# Altium PCB MACH LOC NUOC KAROFI V3 271015.PcbDoc (part 1 of 2)
Units mil, origin at the board's own origin, x right, y up, seen from the top; angles counter-clockwise.
Board outline 2986 x 2286 mil, 2 copper layers (Top Layer, Bottom Layer); 83 components, 86 nets, 303 pads, 107 vias.
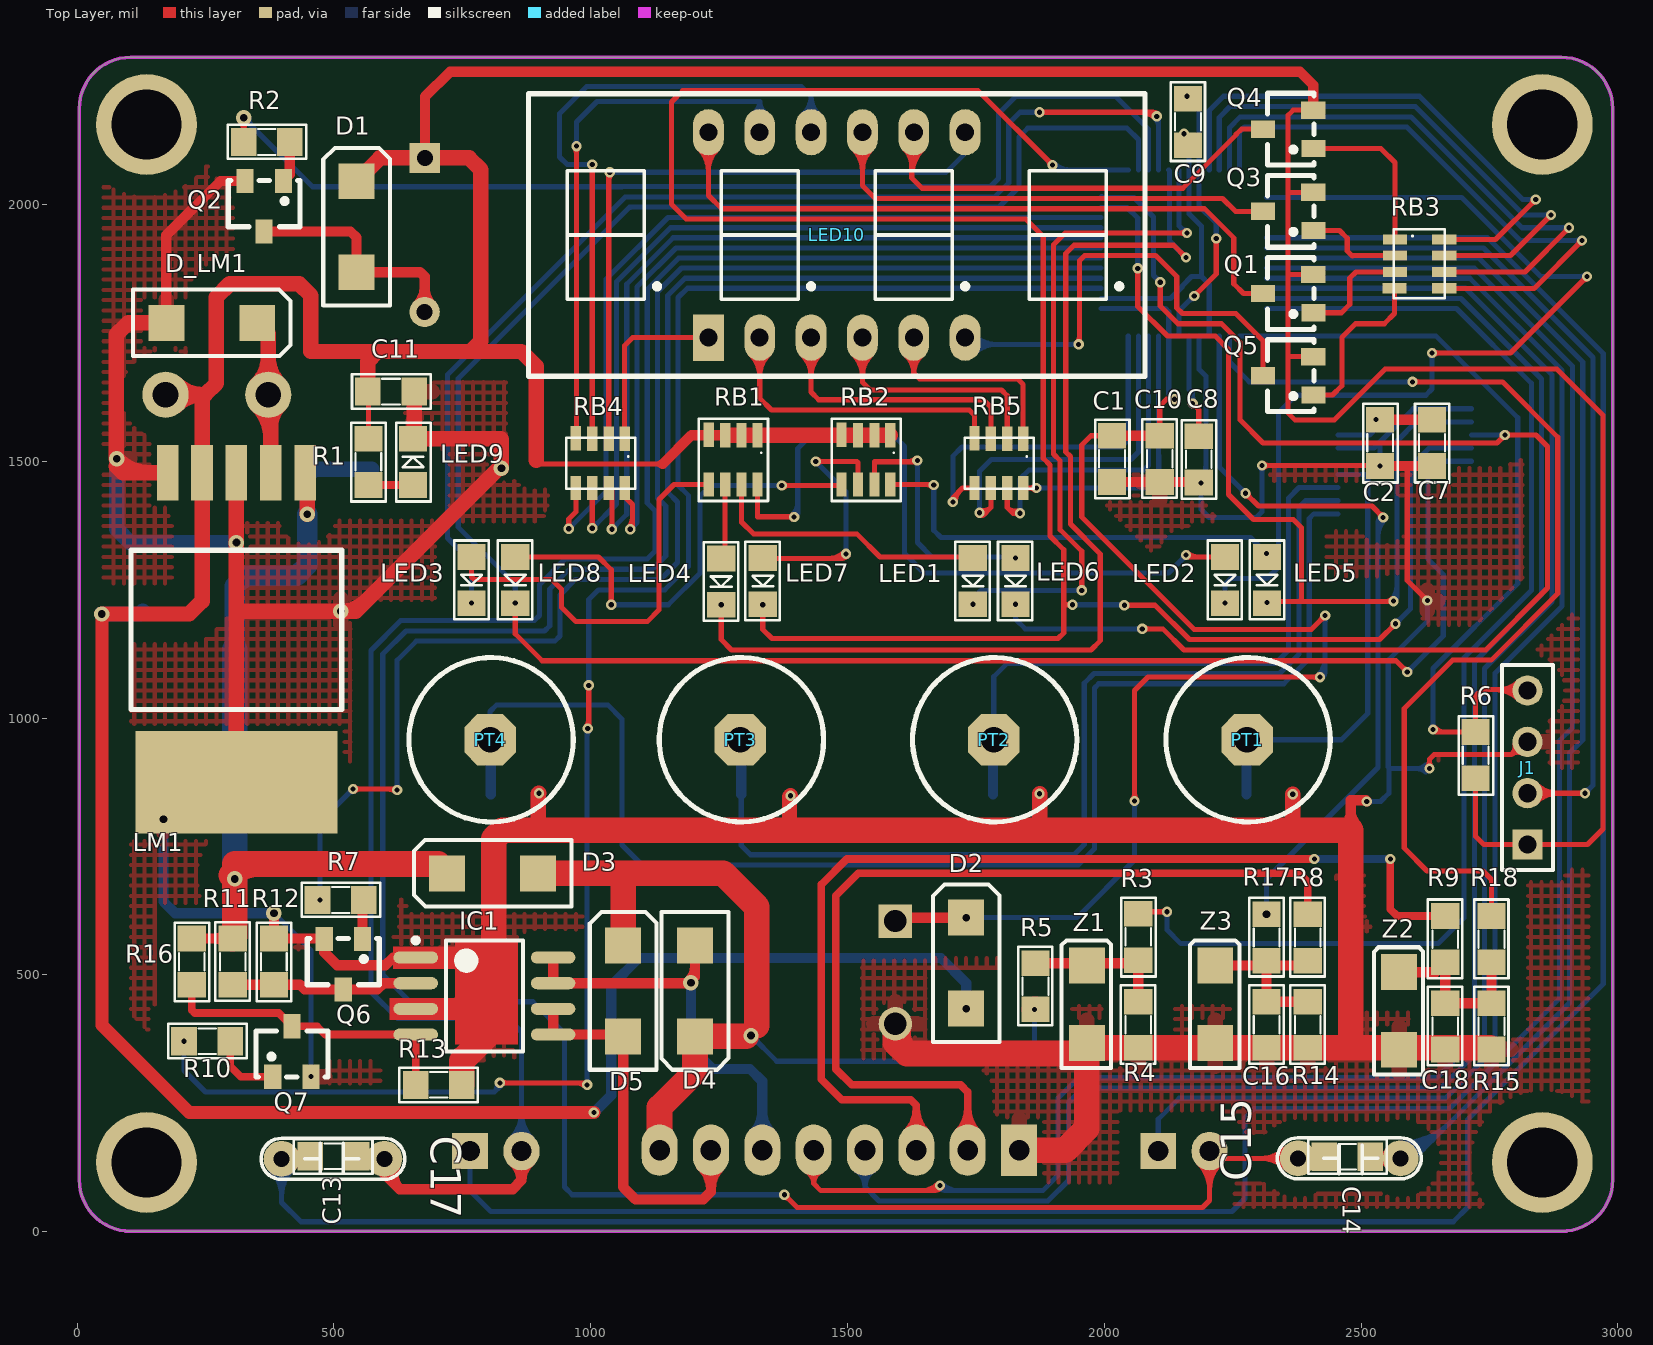
[diagram p0: Top Layer view]
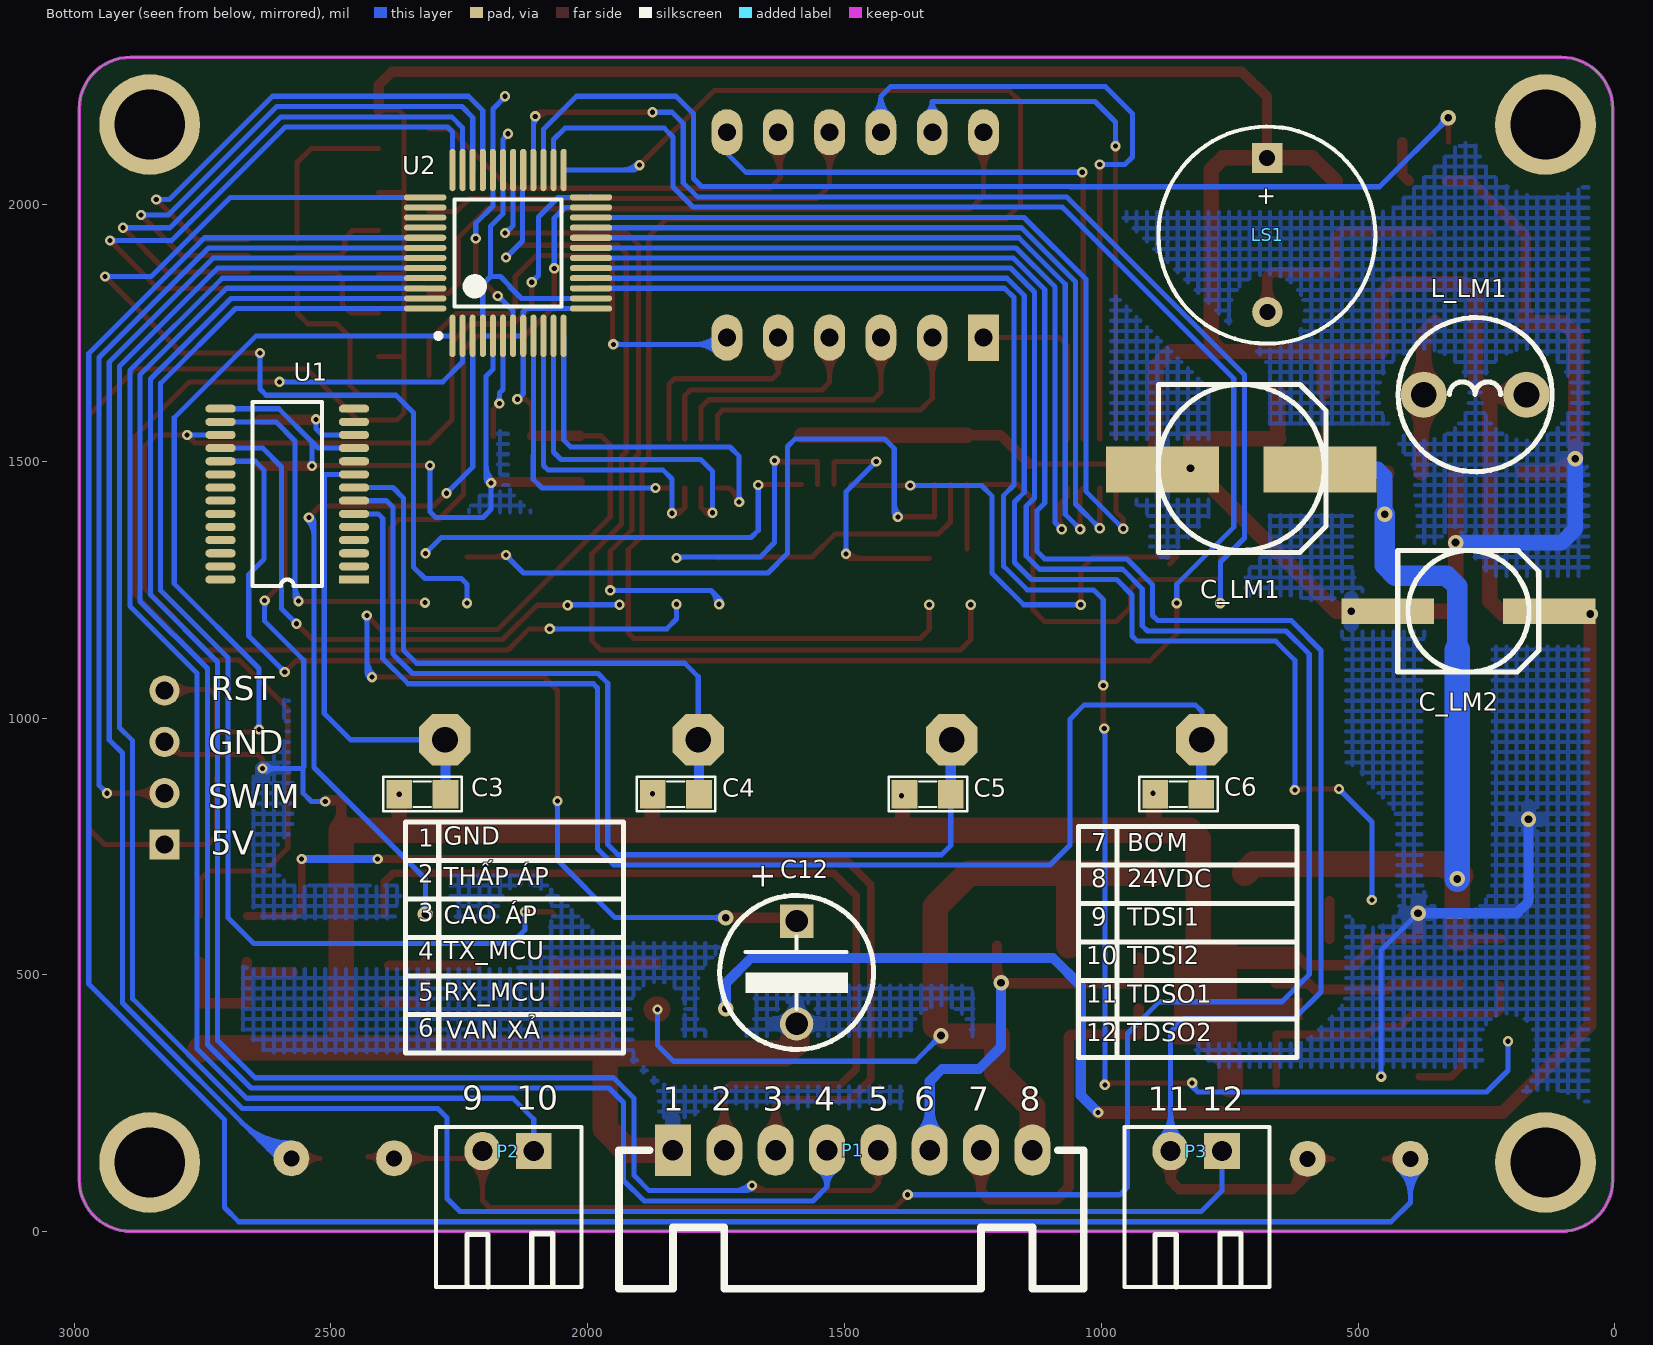
[diagram p1: Bottom Layer view, seen from below]
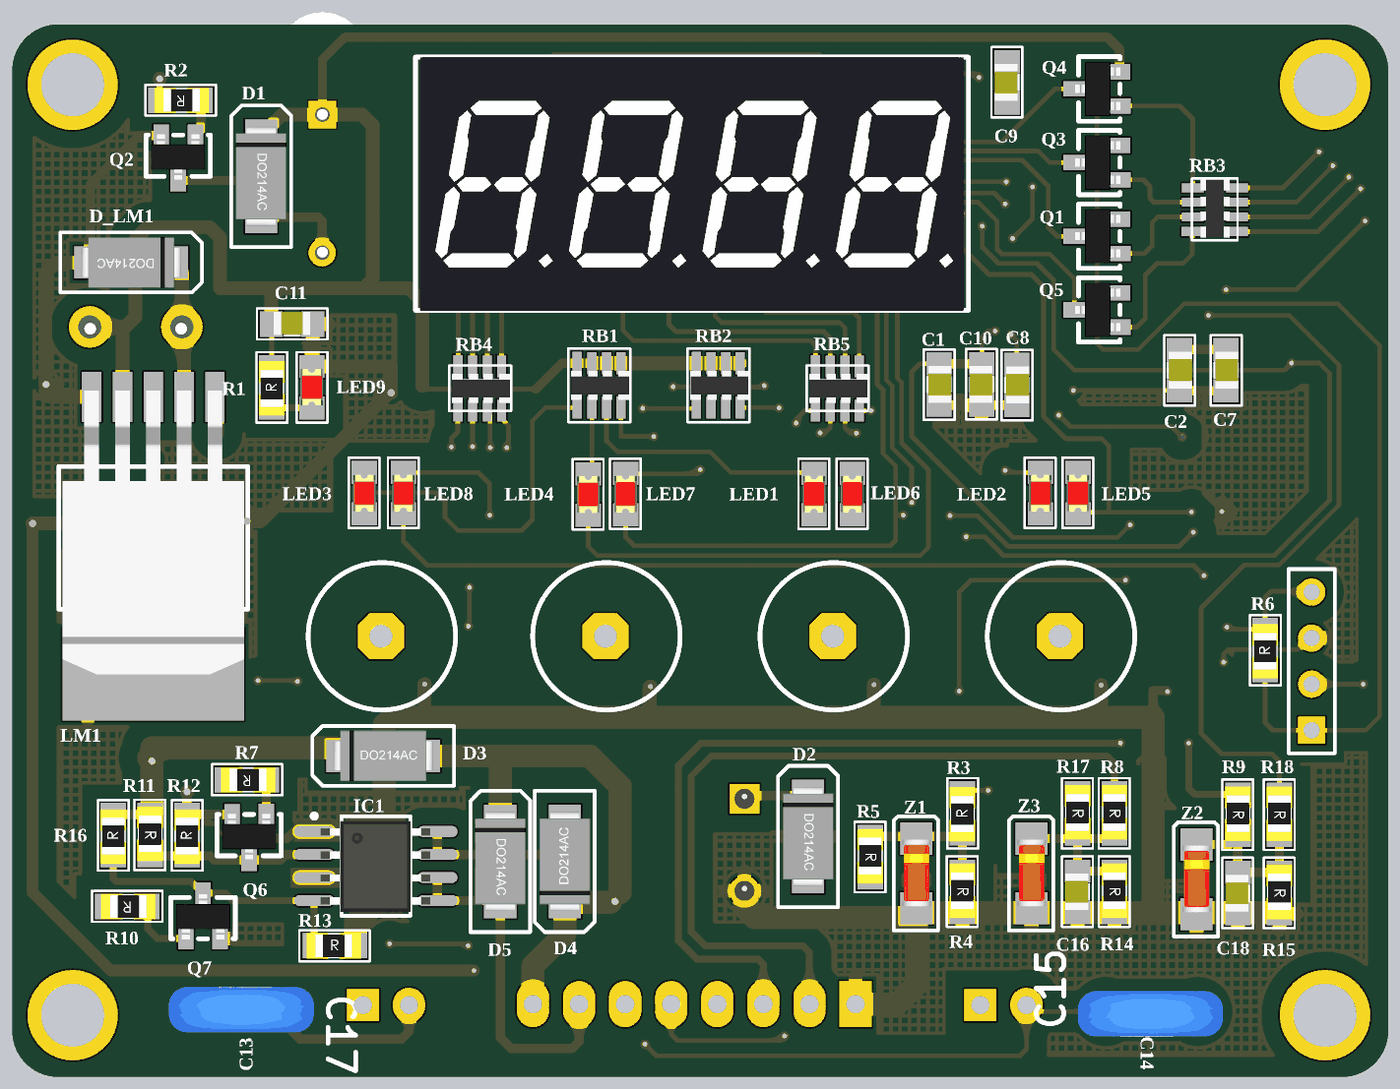
[diagram p3: 3D render of the assembled board from above, using the file's embedded part models]
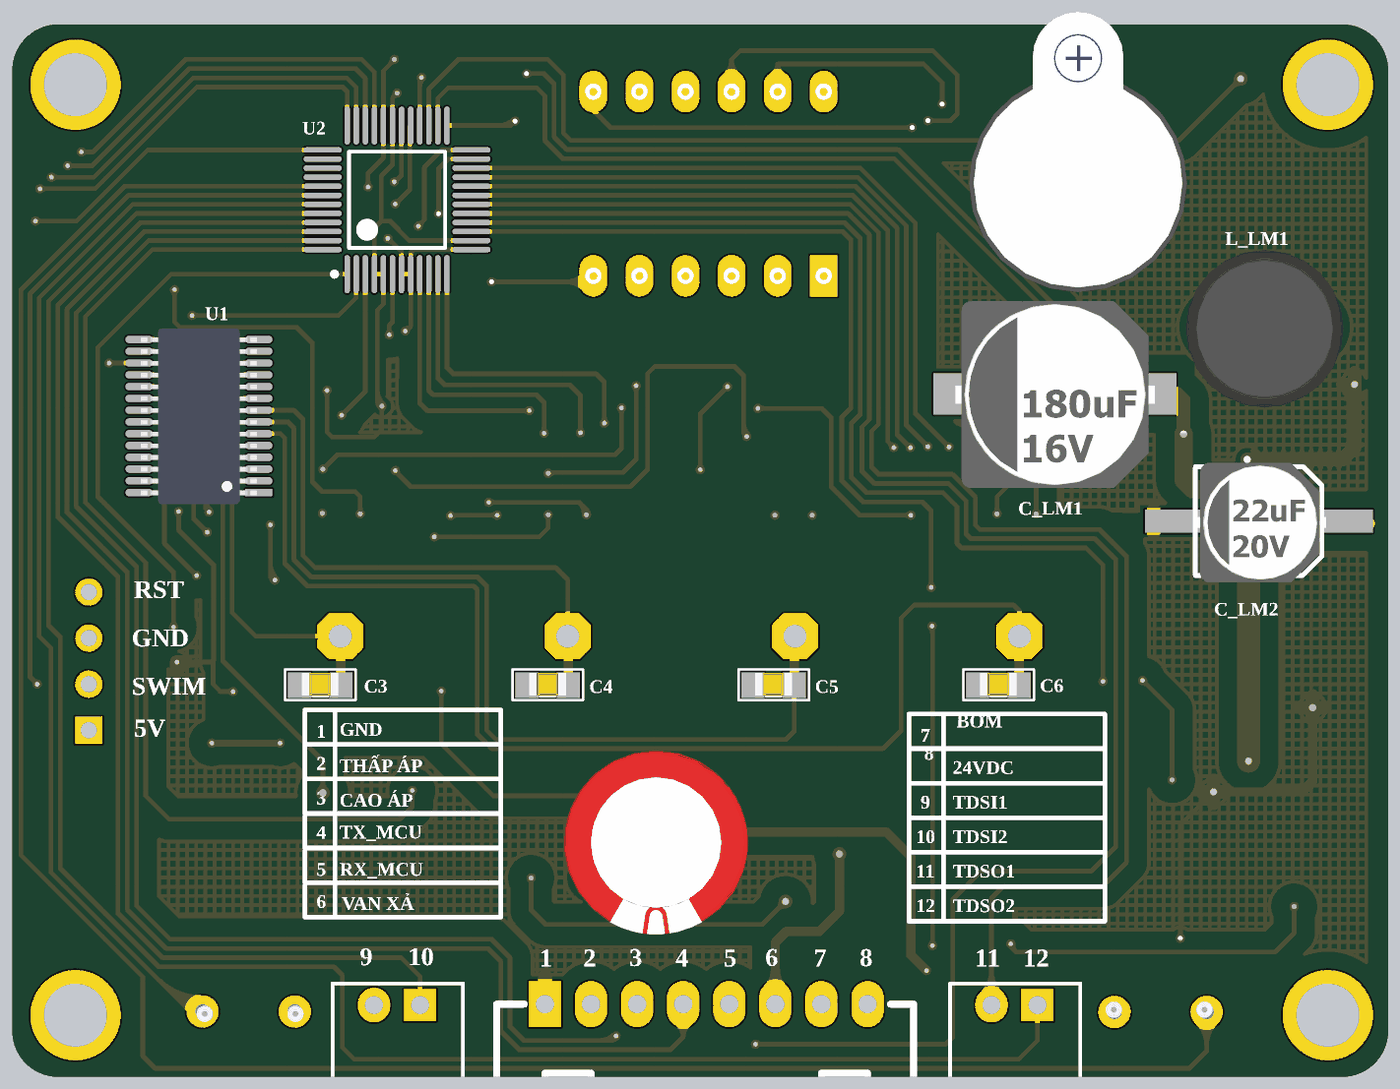
[diagram p4: 3D render of the assembled board from below, using the file's embedded part models]

## Layer stack, top to bottom
Top Solder: solder mask 0.4, Solder Resist, Dk 3.5
Top Layer: signal copper 1.4
Dielectric1: dielectric 12.6, FR-4, Dk 4.8
Bottom Layer: signal copper 1.4
Bottom Solder: solder mask 0.4, Solder Resist, Dk 3.5

## Board outline
4,101 ccw(c104,101) 104,1 2890,1 ccw(c2890,101) 2990,101 2990,2187 ccw(c2890,2187) 2890,2287 104,2287 ccw(c104,2187) 4,2187

## Design rules (kind name [scope] priority, off if disabled: settings)
Clearance Polygon [InNamedPolygon('bot')] p1: gap=40
Clearance [All] p2: gap=10
PlaneConnect [All] p1: planeconnectstyle=Relief reliefexpansion=20 reliefentries=4 reliefconductorwidth=30 reliefairgap=10
PolygonConnect [All] p1: connectstyle=Relief reliefconductorwidth=30 reliefentries=4 polygonreliefangle="90 Angle" airgapwidth=10
RoutingVias [All] p1: holewidth=15 width=30 viastyle="Through Hole" minholewidth=10 minwidth=20 maxholewidth=15 maxwidth=30
SilkToSolderMaskClearance SilkscreenOverComponentPads [IsPad] p1: minsilkscreentomaskgap=10 clearancetoexposedcopper=TRUE
SolderMaskExpansion [All] p1: expansion=4
Width [All] p1: maxlimit=60 minlimit=10 preferedwidth=20
28 further rules are at their usual default settings.

## Components (designator, comment, footprint, x,y, rotation, side; value= is the part's Value field where it differs from the comment)
C1 "106" "Tu 0805" 2015,1505 r90 top
C2 "Tu 0805 104" "Tu 0805" 2537,1536 r90 top
C3 "Tu 0805 22p" "Tu 0805" 2322,852 r0 bottom
C4 "Tu 0805 22p" "Tu 0805" 1828.33,852 r0 bottom
C5 "Tu 0805 22p" "Tu 0805" 1338,852 r0 bottom
C6 "Tu 0805 22p" "Tu 0805" 850,852 r0 bottom
C7 "Tu 0805 106" "Tu 0805" 2638,1536 r90 top
C8 "105" "Tu 0805" 2184,1504 r90 top
C9 "106" "Tu 0805" 2163,2161 r270 top
C10 "106" "Tu 0805" 2108,1505 r270 top
C11 "Tu 0805 1100nF (104)" "Tu 0805" 611,1636 r180 top
C12 "Tu Hoa 470uF - 16V" CAP1000uF25V 1593,505 r90 bottom
C13 "20nf" "Tu 0805" 499,147 r0 top
C14 "20nf" "Tu 0805" 2473,146 r180 top
C15 "20nf" "Tu can Tantan 5.08" 2577,143 r180 top
C16 "1uF 16V" "Tu 0805" 2316,403 r270 top
C17 "20nf" "Tu can Tantan 5.08" 398,142 r0 top
C18 "1uF 16V" "Tu 0805" 2664,400 r270 top
C_LM1 "Tu Nhom100uF - 50V" "Tu Nhom 100uF -50V" 562,1323 r90 bottom
C_LM2 "Tu Hoa 1000uF - 16V" "CAP 100uF-50V SMD" 282,1210 r180 bottom
D1 "1N4007" "DO - SMB" 544,1957 r270 top
D2 "1N5819" "DO - SMB" 1731,523 r270 top
D3 "1N5819" "DO - SMB" 809,698 r0 top
D4 "1N4007" "DO - SMB" 1203,469 r90 top
D5 "1N4007" "DO - SMB" 1063,469 r270 top
D_LM1 "Diode 1N5822 (SS34)" "DO - SMB" 262,1770 r180 top
IC1 "APM9926" SO-8N 793,459 r0 top
J1 "ST-link" HDR1X4 2824,754 r90 top
L_LM1 "Cuon Cam 100uH 3A" L100uH3A 272,1630 r180 bottom
LED1 "LED 0805 Do SMD" LED0805_MH 1744,1267 r270 top
LED2 "LED 0805 Do SMD" LED0805_MH 2235,1269 r270 top
LED3 "LED 0805 Do SMD" LED0805_MH 768,1269 r270 top
LED4 "LED 0805 Do SMD" LED0805_MH 1254,1266 r270 top
LED5 "LED 0805 Do SMD" LED0805_MH 2317,1269 r270 top
LED6 "LED 0805 Do SMD" LED0805_MH 1827,1267 r270 top
LED7 "LED 0805 Do SMD" LED0805_MH 1335,1267 r270 top
LED8 "LED 0805 Do SMD" LED0805_MH 853,1269 r270 top
LED9 "LED3" LED0805_MH 654,1499 r90 top
LED10 "LED7SEG4DIGIT" LED7seg4 1179,1666 r0 top locked
LM1 "LM2576S-5V SMD" TO263-5 310,1477 r180 top
LS1 "SPEAKER" SPEAKER 677,2091 r270 bottom
P1 "Header 8" "Header 8P 2.54 Duc Cong" 1834,159 r270 bottom locked
P2 "Header 2" "Header 2 Duc Cong 2.54" 2004,-141 r180 bottom
P3 "Header 2" "Header 2 Duc Cong 2.54" 664,-141 r180 bottom locked
PT1 "PAD TOUCH" "PAD TOUCH" 2278,958 r0 top
PT2 "PAD TOUCH" "PAD TOUCH" 1784.67,958 r0 top
PT3 "PAD TOUCH" "PAD TOUCH" 1291.33,958 r0 top
PT4 "PAD TOUCH" "PAD TOUCH" 804,958 r0 top
Q1 "A1015" SOT23B 2363,1832 r90 top
Q2 "S8050" SOT23B 359,2002 r180 top
Q3 "A1015" SOT23B 2363,1992 r90 top
Q4 "A1015" SOT23B 2363,2152 r90 top
Q5 "A1015" SOT23B 2363,1672 r90 top
Q6 "C1815" SOT23B 513,526 r180 top
Q7 "C1815" SOT23B 423,346 r0 top
R1 "Tro 0805 1k" "Tro SMD 0805" 567,1499 r90 top
R2 "Tro 0805 1k" "Tro SMD 0805" 369,2122 r180 top
R3 "Tro 0805 1k" "Tro SMD 0805" 2066,574 r90 top
R4 "Tro 0805 4k7 5%" "Tro SMD 0805" 2066,403 r270 top
R5 "Tro 0805 4k7 5%" "Tro SMD 0805" 1866,478 r270 top
R6 "Tro 0805 4k7 5%" "Tro SMD 0805" 2723,928 r90 top
R7 "Tro 0805 1k" "Tro SMD 0805" 513,646 r180 top
R8 "Tro 0805 4k7 5%" "Tro SMD 0805" 2396,573 r270 top
R9 "Tro 0805 4k7 5%" "Tro SMD 0805" 2664,570 r270 top
R10 "Tro 0805 1k" "Tro SMD 0805" 253,371 r180 top
R11 "Tro 0805 4.7K" "Tro SMD 0805" 303,526 r270 top
R12 "Tro 0805 4.7K" "Tro SMD 0805" 383,526 r90 top
R13 "Tro 0805 4.7K" "Tro SMD 0805" 704,286 r0 top
R14 "Tro 0805 4k7 5%" "Tro SMD 0805" 2396,403 r270 top
R15 "Tro 0805 4k7 5%" "Tro SMD 0805" 2754,400 r270 top
R16 "Tro 0805 4.7K" "Tro SMD 0805" 223,526 r90 top
R17 "Tro 0805 1k" "Tro SMD 0805" 2316,573 r270 top
R18 "Tro 0805 1k" "Tro SMD 0805" 2754,570 r270 top
RB1 "Tro 06031k 5%" "Tro Bang 4 0603" 1229.67,1533 r270 top
RB2 "Tro 06031k 5%" "Tro Bang 4 0603" 1488.33,1533 r270 top
RB3 "Tro 06031k 5%" "Tro Bang 4 0603" 2584,1837 r0 top
RB4 "Tro 0603 200R 5%" "Tro Bang 4 0603" 971,1526.12 r270 top
RB5 "Tro 0603 200R 5%" "Tro Bang 4 0603" 1747,1526.12 r270 top
U1 "TTP222E - 807" TSSOP28 2455,1270 r0 bottom
U2 "STM8S105C4" 48A_M 2155,1906 r90 bottom
Z1 "Diode Zener 5V" "ZENNER SMD" 1966,443 r90 top
Z2 "Diode Zener 5V" "ZENNER SMD" 2574,430 r90 top
Z3 "Diode Zener 5V" "ZENNER SMD" 2216,443 r90 top

## Footprints (in the part's own frame and the unit in brackets; to place one, negate y for a bottom-side part, rotate by r counter-clockwise, add the part's x,y. Pads: shape width x height; smd on the part's side, far side on the other; paste and mask are expansions set on the pad)
48A_M [mm] "Thin QFP, 48-Leads, Body 7x7mm, Pitch 0.5mm, IPC Low Density"
  oval 2.1x0.3 smd: 1(-4.1,2.75) 2(-4.1,2.25) 3(-4.1,1.75) 4(-4.1,1.25) 5(-4.1,0.75) 6(-4.1,0.25) 7(-4.1,-0.25) 8(-4.1,-0.75) 9(-4.1,-1.25) 10(-4.1,-1.75) 11(-4.1,-2.25) 12(-4.1,-2.75) 25(4.1,-2.75) 26(4.1,-2.25) 27(4.1,-1.75) 28(4.1,-1.25) 29(4.1,-0.75) 30(4.1,-0.25) 31(4.1,0.25) 32(4.1,0.75) 33(4.1,1.25) 34(4.1,1.75) 35(4.1,2.25) 36(4.1,2.75)
  oval 0.3x2.1 smd: 13(-2.75,-4.1) 14(-2.25,-4.1) 15(-1.75,-4.1) 16(-1.25,-4.1) 17(-0.75,-4.1) 18(-0.25,-4.1) 19(0.25,-4.1) 20(0.75,-4.1) 21(1.25,-4.1) 22(1.75,-4.1) 23(2.25,-4.1) 24(2.75,-4.1) 37(2.75,4.1) 38(2.25,4.1) 39(1.75,4.1) 40(1.25,4.1) 41(0.75,4.1) 42(0.25,4.1) 43(-0.25,4.1) 44(-0.75,4.1) 45(-1.25,4.1) 46(-1.75,4.1) 47(-2.25,4.1) 48(-2.75,4.1)
  silkscreen extent -4.22,-2.65 2.65,3.57, body extent -3.5,-3.5 3.5,3.5, height 1.6
CAP1000uF25V [mil]
  rect 65x65 hole 43.31: 1(100,0)
  round 65 hole 43.31: 2(-100,0)
  silkscreen extent -150,-150 150,150, body extent -195,-200 205,200, height 400
"CAP 100uF-50V SMD" [mil]
  rect 180x50 smd: 1(154.69,-1.89) 2(-160.28,-1.89)
  silkscreen extent -141,-120 134,116, body extent -144,-135 144,125, height 232
"DO - SMB" [mil]
  rect 70x70 smd: 1(88.58,0) 2(-88.58,0)
  silkscreen extent -154,-65 154,65, body extent -108,-55 108,55, height 91
HDR1X4 [mm] "Connector; Header; 4 Position"
  rect 1.5x1.5 hole 0.9: 1(0,0)
  round 1.5 hole 0.9: 2(2.54,0) 3(5.08,0) 4(7.62,0)
  silkscreen extent -1.27,-1.27 8.89,1.27, body extent -1.27,-1.27 8.89,1.27, height 7
"Header 2 Duc Cong 2.54" [mil]
  rect 70x70 hole 39.37 unplated: 1(-101,298)
  oval 70x75 hole 39.37 unplated: 2(-201,298)
  silkscreen extent -291,33 -8,345
"Header 8P 2.54 Duc Cong" [mil]
  rect 100x70 hole 40: 1(0,0)
  oval 100x70 hole 40: 2(0,100) 3(0,200) 4(0,300) 5(0,400) 6(0,500) 7(0,600) 8(0,700)
  silkscreen extent 0,-105 270,800
L100uH3A [mil] "100uH3A"
  round 90 hole 50: 1(-100,0) 2(100,0)
  silkscreen extent -150,-150 150,150, body extent -171,-175 171,167, height 394
LED7seg4 [mil] "LED7seg4"
  rect 60x90 hole 35: 1(50,75)
  oval 60x90 hole 35: 2(150,75) 3(250,75) 4(350,75) 5(450,75) 6(550,75) 7(550,475) 8(450,475) 9(350,475) 10(250,475) 11(150,475) 12(50,475)
  silkscreen extent -300,0 900,550, body extent -291,-1 891,550, height 300
LED0805_MH [mil] "led dán 0805"
  rect 50x55 smd: 1(-45,0) 2(45,0)
  silkscreen extent -77,-34 76,33, body extent -40,-25 40,25, height 43
"PAD TOUCH" [mil]
  oct 100x100 hole 50: 1(0,0)
  silkscreen extent -158,-160 162,160
SO-8N [mm] "SOP, 8-Leads, Body 5.3x5.3mm, Pitch 1.27mm, IPC Medium Density"
  oval 2.2x0.6 smd: 1(-3.4,1.905) 2(-3.4,0.635) 3(-3.4,-0.635) 4(-3.4,-1.905) 5(3.4,-1.905) 6(3.4,-0.635) 7(3.4,0.635) 8(3.4,1.905)
  silkscreen extent -3.52,-2.75 1.9,2.88, body extent -3.05,-2.54 3,2.48, height 1.6
SOT23B [mm] "SOT 23B"
  rect 0.85x1.2 smd: 1(-1.077,-1.123) 2(-0.127,1.377) 3(0.813,-1.118)
  silkscreen extent -1.91,-1.14 1.65,1.14, body extent -1.63,-1.17 1.37,1.33, height 1.06
SPEAKER [mm]
  rect 1.5x1.5 hole 0.8: 1(0,0)
  round 1.5 hole 0.8: 2(7.62,0.013)
  silkscreen extent -1.55,-5.38 9.18,5.36, body extent -5.67,-6 9.78,6, height 3.99
TO263-5 [mm] "LM2576-SMD"
  rect 1.07x2.75 smd: 1(-3.4,-0.025) 2(-1.7,-0.025) 3(0,-0.025) 4(1.7,-0.025) 5(3.4,-0.025)
  rect 10x5.08 smd: 6(0,15.289)
  silkscreen extent -5.21,3.81 5.21,11.68, body extent -5,-0.38 5,15.29, height 4.79
"Tro Bang 4 0603" [mil]
  rect 47.24x20 smd: 1(-18,95) 2(-18,64) 3(-18,32) 4(-19,0) 5(78,0) 6(78,32) 7(78,64) 8(78,95)
  silkscreen extent -50,-19 110,116, body extent -1,-13 61,113, height 22
"Tro SMD 0805" [mil]
  rect 50x55 smd: 1(-45,0) 2(45,0)
  silkscreen extent -77,-34 76,33, body extent -62,-28 56,27, height 21
TSSOP28 [mm]
  rect 1.5x0.4 smd: 1(0,0)
  oval 1.5x0.4 smd: 2(0,-0.65) 3(0,-1.3) 4(0,-1.95) 5(0,-2.6) 6(0,-3.25) 7(0,-3.9) 8(0,-4.55) 9(0,-5.2) 10(0,-5.85) 11(0,-6.5) 12(0,-7.15) 13(0,-7.8) 14(0,-8.45) 15(6.6,-8.45) 16(6.6,-7.8) 17(6.6,-7.15) 18(6.6,-6.5) 19(6.6,-5.85) 20(6.6,-5.2) 21(6.6,-4.55) 22(6.6,-3.9) 23(6.6,-3.25) 24(6.6,-2.6) 25(6.6,-1.95) 26(6.6,-1.3) 27(6.6,-0.65) 28(6.6,0)
  silkscreen extent 1.58,-8.78 5.02,0.33, body extent 0.1,-9.07 6.5,0.63, height 0.95
"Tu 0805" [mil] "Compoment SMD 80x50mil"
  rect 50x55 smd: 1(-45,0) 2(45,0)
  silkscreen extent -77,-34 76,33, body extent -40,-27 40,23, height 24
"Tu can Tantan 5.08" [mil]
  round 70 hole 31: 1(0,0) 2(200,0)
  silkscreen extent -40,-40 240,40, body extent -54,-44 260,55, height 407
"Tu Nhom 100uF -50V" [mil]
  rect 90x220 smd: 1(161.42,11.81) 2(161.42,318.9)
  silkscreen extent 0,0 327,327, body extent -43,-52 363,382, height 311
"ZENNER SMD" [mil]
  rect 70x70 smd: 1(-75.58,0) 2(75.58,0)
  silkscreen extent -124,-47 124,49, body extent -72,-32 74,31, height 63

## Part data
C1 C8 C9 C10 C13 C14 C15 C17: library part CAP, "Capacitor"
C2 C3 C4 C5 C6 C7 C16 C18: library part "CAP 0805"
C11: library part "0805 104 - 50V", "Capacitor (Semiconductor SIM Model)"
C12: library part CAPACITOR, "Capacitor"
C_LM1 C_LM2: library part "Tu Hoa", "Tu Hoa"
D1 D2 D4 D5: library part DIODE, "Diode"
D3: library part "Diode Dan 1N5819", "Diode Dan 1N5819"
D_LM1: library part DIODE
IC1: library part APM4953, "Dual P-Channel Enhancement Mode MOSFET"
J1: library part CON4, "Connector"
LED1 LED2 LED3 LED4 LED5 LED6 LED7 LED8: library part LED
LED9: library part LEDSMD, "LED 3mm"
LM1: library part LM2576.xxV
P1: "Header, 8-Pin"
P2 P3: "Big Header 2"
Q1 Q3 Q4 Q5: library part 2SA1015, "PNP General Purpose Amplifier"
Q2: library part C1815, "NPN 600mW, ECB"
Q6 Q7: "NPN 600mW, ECB"
R1 R2 R3 R4 R5 R6 R7 R8 R9 R10 R11 R12 R13 R14 R15 R16 R17 R18: library part "Tro 0805", "Tro 0805"
RB1 RB2 RB3 RB4 RB5: library part "Tro Bang 0603", "Tro Bang 0603"
U1: library part TTP222E
Z1 Z2 Z3: library part "Diode Zener", "Diode  Zener"

## Free pads (board coordinates)
  round 196 hole 137: 0(135,135) 0(135,2156) 0(2853,135) 0(2853,2156)

## Via types
v1: diameter 20, hole 10, Top Layer to Bottom Layer, tented both sides, 92 vias
v2: diameter 30, hole 15, Top Layer to Bottom Layer, tented both sides, 15 vias

## Nets (pads, with @x,y where several pads share a name; then routed paths per layer and width w, separated by ;. In a path a pad name is that pad's centre, name@x,y a point inside that pad or via, vN(x,y) a via of type N, cw(c..) or ccw(c..) an arc to the next point about the centre after c; other vN are vias at no path point)
5V: C2.2 C7.2 U1.12 | length 217.1
  Top Layer w20: C2.2@2537,1581 C7.2@2638,1581
  Bottom Layer w10: U1.12@2455,1551.5 2516.5,1551.5 2529,1563.99 v1(2529,1582) ; v1@2525.46,1578.46 cw(c2516.93,1569.93) 2529,1569.93 cw(c2541.07,1569.93) v1@2532.54,1578.46
24V: C_LM1.1 D3.2 LM1.1 R11.1 R16.2 | length 1878.3
  Top Layer w20: R16.2@223,571 R11.1@303,571 ; R11.1@292.39,560.39 ccw(c266.79,534.79) 266.79,571 ccw(c266.79,607.21) R11.1@292.39,581.61
  Top Layer w30: LM1.1@443.86,1478 448,1473.86 v2(448,1397)
  Top Layer w50: v2@299.93,694.07 cw(c352.87,641.13) 352.87,716 ; R11.1@303,571 307,575 v2(307,687) 307,716 702.42,716 D3.2@720.42,698
  Bottom Layer w30: v2(448,1397) 448,1471 461.42,1484.42 C_LM1.1@573.81,1484.42
  Bottom Layer w40: 307,1133 307,1257 327,1277 427,1277 448,1298 v2(448,1397)
  Bottom Layer w50: v2(307,687) 307,1133
24VDC: D3.1 D4.2 D5.2 P1.8 R5.2 | length 1886.6
  Top Layer w50: D3.1@897.58,698 1258,698 1323,633 1323,401 ; D5.2@1063,557.58 1063,696 ; P1.8@1134,159 1134,242 1203,311 D4.2@1203,380.42 v2@1302.42,380.42 ; v1(1864,433) R5.2@1866,433
  Bottom Layer w10: v2@1312,372 cw(c1312,347.86) 1329.07,364.93 cw(c1346.14,382) v2@1322,382 ; v2(1312,382) 1362,332 1833,332 1864,363 v1(1864,433) ; v1@1860.46,429.46 cw(c1851.93,420.93) 1864,420.93 cw(c1876.07,420.93) v1@1867.54,429.46
BOM: D5.1 IC1.5 IC1.6 P1.7 | length 844
  Top Layer w20: IC1.6@926.86,434 IC1.5@926.86,384 1059.42,384 D5.1@1063,380.42 1063,87 1087,63 1219,63 1234,78 P1.7@1234,159 ; P1.7@1216.32,126.32 cw(c1173.64,83.64) 1234,83.64 cw(c1294.36,83.64) P1.7@1251.68,126.32
CHECKPOW: R3.2 U2.48 | length 2411.5
  Top Layer w10: R3.2@2066,619 2070,623 v1(2122,623) ; v1@2118.46,619.46 ccw(c2109.93,610.93) 2109.93,623 ccw(c2109.93,635.07) v1@2118.46,626.54
  Bottom Layer w10: v1@2118.46,619.46 cw(c2109.93,610.93) 2122,610.93 cw(c2134.07,610.93) v1@2125.54,619.46 ; v1(2122,623) 2122,588 2149,561 2650,561 2700.57,611.57 2700.57,1117.86 2831.5,1248.78 2831.5,1652.23 2685.99,1797.73 U2.48@2316.42,1797.73
COI_CHIP: R2.2 U2.27 | length 2193.2
  Top Layer w10: v2@316.93,2161.93 cw(c299.86,2144.86) 324,2144.86 cw(c348.14,2144.86) v2@331.07,2161.93 ; R2.2@324,2122 v2(324,2169)
  Bottom Layer w10: v2@324,2159 cw(c324,2134.86) 341.07,2151.93 cw(c358.14,2169) v2@334,2169 ; v2(324,2169) 458,2035 1060.36,2035 1060.57,2035.21 1778.21,2035.21 1794,2051 1794,2177 1828,2211 2022,2211 2086.1,2146.9 U2.27@2086.1,2067.42
DATA_LED_A: RB4.5 U2.22 | length 1652.6
  Top Layer w10: v1@953.46,1372.54 ccw(c944.93,1381.07) 957,1381.07 ccw(c969.07,1381.07) v1@960.54,1372.54 ; v1(957,1369) 957,1388 971,1402 RB4.5@971,1448.12
  Bottom Layer w10: v1(957,1369) 1030,1442 1030,1855 1150.21,1975.21 1993.27,1975.21 U2.22@1993.58,1974.9 ; v1@957,1374 ccw(c957,1386.07) 965.54,1377.54 ccw(c974.07,1369) v1@962,1369
DATA_LED_B: RB4.7 U2.20 | length 1570.6
  Top Layer w10: RB4.7@1035,1448.12 1041,1442.12 v1(1041,1368) ; v1@1037.46,1371.54 ccw(c1028.93,1380.07) 1041,1380.07 ccw(c1053.07,1380.07) v1@1044.54,1371.54
  Bottom Layer w10: v1(1041,1368) 1070,1397 1070,1845 1160.53,1935.53 U2.20@1993.58,1935.53 ; v1@1041,1373 ccw(c1041,1385.07) 1049.54,1376.54 ccw(c1058.07,1368) v1@1046,1368
DATA_LED_C: RB5.7 U2.10 | length 711.6
  Top Layer w10: RB5.7@1811,1448.12 1811,1410 ; v1@1832.46,1395.46 ccw(c1823.93,1386.93) 1823.93,1399 ccw(c1823.93,1411.07) v1@1832.46,1402.54 ; v1@1834.65,1403.81 cw(c1828.11,1427.11) 1811,1410 ; v1(1836,1399) 1822,1399 1811,1410
  Bottom Layer w10: v1@1832.46,1402.54 ccw(c1823.93,1411.07) 1836,1411.07 ccw(c1848.07,1411.07) v1@1839.54,1402.54 ; v1(1836,1399) 1836,1466 1853,1483 2077,1483 2086.1,1492.1 U2.10@2086.1,1744.58
DATA_LED_D: RB5.5 U2.12 | length 748.3
  Top Layer w10: v1(1705,1421) 1705,1429 1724.12,1448.12 RB5.5@1747,1448.12 ; v1@1710,1421 cw(c1741.38,1421) 1719.19,1443.19
  Bottom Layer w10: v1@1701.46,1424.54 ccw(c1692.93,1433.07) 1705,1433.07 ccw(c1717.07,1433.07) v1@1708.54,1424.54 ; v1(1705,1421) 1705,1510 1723,1528 2033,1528 2046.73,1541.73 U2.12@2046.73,1744.58
DATA_LED_E: RB4.8 U2.19 | length 1539.5
  Top Layer w10: RB4.8@1066,1448.12 1066,1431 1081,1416 1081,1372 v1(1077,1368) ; v1@1073.46,1371.54 ccw(c1055.27,1389.73) 1081,1389.73
  Bottom Layer w10: v1(1077,1368) 1090,1381 1090,1840 1165.84,1915.84 U2.19@1993.58,1915.84 ; v1@1077,1373 ccw(c1077,1385.07) 1085.54,1376.54 ccw(c1094.07,1368) v1@1082,1368
DATA_LED_F: RB4.6 U2.21 | length 1602.7
  Top Layer w10: v1@999.46,1373.54 ccw(c990.93,1382.07) 1003,1382.07 ccw(c1015.07,1382.07) v1@1006.54,1373.54 ; v1(1003,1370) RB4.6@1003,1448.12
  Bottom Layer w10: v1(1003,1370) 1050,1417 1050,1850 1155,1955 1993.37,1955 U2.21@1993.58,1955.21 ; v1@1003,1375 ccw(c1003,1387.07) 1011.54,1378.54 ccw(c1020.07,1370) v1@1008,1370
DATA_LED_G: RB5.8 U2.9 | length 588.5
  Top Layer w10: RB5.8@1842,1448.12 v1(1867.88,1448.12) ; v1@1864.34,1444.59 ccw(c1855.81,1436.05) 1855.81,1448.12 ccw(c1855.81,1460.19) v1@1864.34,1451.66
  Bottom Layer w10: v1(1867.88,1448.12) 2089.12,1448.12 2106.1,1465.1 2106.1,1511 ; v1@1871.41,1444.59 cw(c1879.95,1436.05) 1879.95,1448.12 cw(c1879.95,1460.19) v1@1871.41,1451.66 ; 2105.79,1511 U2.9@2105.79,1744.58
DATA_LED_H: RB5.6 U2.11 | length 750.1
  Top Layer w10: v1@1755.57,1395.21 ccw(c1758.9,1406.37) 1767.14,1398.13 ; v1(1757,1400) 1769,1400 1779,1410 ; v1@1758.43,1404.79 ccw(c1764.34,1424.65) 1779,1410 ; RB5.6@1779,1448.12 1779,1410
  Bottom Layer w10: v1@1753.46,1403.54 ccw(c1744.93,1412.07) 1757,1412.07 ccw(c1769.07,1412.07) v1@1760.54,1403.54 ; v1(1757,1400) 1757,1481 1780,1504 2052,1504 2066.42,1518.42 U2.11@2066.42,1744.58
"DK BOM": R10.2 U2.15 | length 3563.2
  Top Layer w10: v1(823,290) 989,290 v1(993,286) ; v1@826.54,286.46 cw(c835.07,277.93) 835.07,290 cw(c835.07,302.07) v1@826.54,293.54 ; 971.27,290 cw(c971.27,264.27) v1@989.46,282.46 ; v1@990.46,983.54 ccw(c977.1,996.9) 996,996.9 ; v1@992.46,1060.46 cw(c983.93,1051.93) 996,1051.93 cw(c1008.07,1051.93) v1@999.54,1060.46 ; v1(994,980) 996,982 v1(996,1064)
  Bottom Layer w10: v1@204.46,367.46 cw(c195.93,358.93) 208,358.93 cw(c220.07,358.93) v1@211.54,367.46 ; v1(208,371) 208,314 250,272 812,272 ; v1@818.03,289.41 cw(c797.08,286.92) 812,272 ; v1(823,290) 823,283 812,272 ; v1@989.46,289.54 ccw(c980.93,298.07) 993,298.07 ccw(c1005.07,298.07) v1@996.54,289.54 ; v1@992.46,1067.54 ccw(c983.93,1076.07) 996,1076.07 ccw(c1008.07,1076.07) v1@999.54,1067.54 ; v1(993,286) 993,979 v1(994,980) ; 993,965.51 cw(c1008.49,965.51) v1@997.54,976.46 ; v1(996,1064) 996,1231 1015,1250 1144,1250 1190,1296 1190,1434 1170,1454 1170,1819 1188.1,1837.1 U2.15@1993.58,1837.1
DK_VAN_XA: R7.2 U2.16 | length 2734.9
  Top Layer w10: R7.2@468,646 v1(473,646) ; v1(537,862) 621,862 v1(623,860) ; v1@540.54,858.46 cw(c549.07,849.93) 549.07,862 cw(c549.07,874.07) v1@540.54,865.54 ; 606.1,862 cw(c606.1,843.1) v1@619.46,856.46
  Bottom Layer w10: v1@469.46,649.54 ccw(c460.93,658.07) 473,658.07 ccw(c485.07,658.07) v1@476.54,649.54 ; v1(473,646) 473,798 v1(537,862) ; v1@532,862 cw(c519.93,862) 528.46,853.46 cw(c537,844.93) v1@537,857 ; v1@619.46,863.54 ccw(c610.93,872.07) 623,872.07 ccw(c635.07,872.07) v1@626.54,863.54 ; v1(623,860) 623,1113 660,1150 930,1150 940,1160 940,1240 970,1270 1135.72,1270 1169,1303.28 1169,1421 1150,1440 1150,1823.04 1183.75,1856.79 U2.16@1993.58,1856.79
DKLED1: RB3.8 U2.33 | length 1094.6
  Top Layer w10: RB3.8@2662,1932 2762,1932 v1(2840,2010) ; v1@2835,2010 cw(c2822.93,2010) 2831.46,2001.46 cw(c2840,1992.93) v1@2840,2005
  Bottom Layer w10: U2.33@2204.21,2067.42 2204.21,2183.21 2232,2211 2613.85,2211 2814.85,2010 v1(2840,2010) ; v1@2836.46,2006.46 ccw(c2827.93,1997.93) 2827.93,2010 ccw(c2827.93,2022.07) v1@2836.46,2013.54
DKLED2: RB3.7 U2.34 | length 1123.4
  Top Layer w10: RB3.7@2662,1901 2791,1901 v1(2870,1980) ; v1@2865,1980 cw(c2852.93,1980) 2861.46,1971.46 cw(c2870,1962.93) v1@2870,1975
  Bottom Layer w10: U2.34@2223.9,2067.42 2223.9,2169.9 2245,2191 2605.57,2191 2816.57,1980 v1(2870,1980) ; v1@2866.46,1976.46 ccw(c2857.93,1967.93) 2857.93,1980 ccw(c2857.93,1992.07) v1@2866.46,1983.54
DKLED3: RB3.6 U2.35 | length 1158.6
  Top Layer w10: RB3.6@2662,1869 2819,1869 v1(2905,1955) ; v1@2900,1955 cw(c2887.93,1955) 2896.46,1946.46 cw(c2905,1937.93) v1@2905,1950
  Bottom Layer w10: U2.35@2243.58,2067.42 2243.58,2149.87 2264.72,2171 2597.28,2171 2813.28,1955 v1(2905,1955) ; v1@2901.46,1951.46 ccw(c2892.93,1942.93) 2892.93,1955 ccw(c2892.93,1967.07) v1@2901.46,1958.54
DKLED4: RB3.5 U2.36 | length 1180.6
  Top Layer w10: RB3.5@2662,1837 2837,1837 v1(2930,1930) ; v1@2925,1930 cw(c2912.93,1930) 2921.46,1921.46 cw(c2930,1912.93) v1@2930,1925
  Bottom Layer w10: U2.36@2263.27,2067.42 2263.27,2141.27 2273,2151 2589,2151 2810,1930 v1(2930,1930) ; v1@2926.46,1926.46 ccw(c2917.93,1917.93) 2917.93,1930 ccw(c2917.93,1942.07) v1@2926.46,1933.54
GND: C1.1 C2.1 C3.2 C4.2 C5.2 C6.2 C7.1 C8.1 C9.2 C10.2 C11.1 C12.2 C16.2 C18.2 C_LM1.2 C_LM2.2 D_LM1.1 IC1.1 IC1.3 J1.3 LED9.2 LM1.3 LM1.5 LM1.6 P1.1 Q2.3 Q6.3 Q7.3 R4.2 R12.2 R13.2 R14.2 R15.2 U1.11 U1.15 U2.4 U2.5 U2.14 U2.31 Z1.1 Z2.1 Z3.1 | length 12424.1
  Top Layer w10: v1(2307,1492) 2536,1492 v1(2537,1491) ; v1@2310.54,1488.46 cw(c2319.07,1479.93) 2319.07,1492 cw(c2319.07,1504.07) v1@2310.54,1495.54 ; C2.1@2522.51,1492 cw(c2522.51,1476.51) C2.1@2533.46,1487.46 ; 2586.46,1487.46 cw(c2577.93,1478.93) 2590,1478.93 cw(c2602.07,1478.93) 2593.54,1487.46 ; 2590,1491 2590,1268 v1(2629,1229) ; v1@2624,1229 ccw(c2611.93,1229) 2620.46,1237.54 ccw(c2629,1246.07) v1@2629,1234 ; v1@2629.46,905.54 ccw(c2620.93,914.07) 2633,914.07 ccw(c2645.07,914.07) v1@2636.54,905.54 ; v1(2633,902) 2633,920 2642,929 2793,929 ; J1.3@2799.79,950.06 cw(c2775.85,946.16) 2793,929 ; J1.3@2812.86,932.15 ccw(c2805.1,916.91) 2793,929 ; J1.3@2824,954 2818,954 2793,929
  Top Layer w20: D_LM1.1@173.42,1789 173.42,1940.42 279,2046 Q2.3@327,2046 ; v2(383,620) R12.2@383,571 Q6.3@480,571 ; Q6.3@481,570 481,544 506,519 600,519 615,534 IC1.1@659.14,534 ; C1.1@2015,1460 C10.2@2108,1460 C8.1@2183,1460 ; 2469.39,792.61 ccw(c2443.79,818.21) 2480,818.21 ccw(c2516.21,818.21) 2490.61,792.61 ; 2480,355 C18.2@2664,355 R15.2@2754,355 ; 2480,782 2480,840 2509,840 v1(2511,838) ; v1(2537,1491) 2590,1491 C7.1@2638,1491 ; R15.2@2743.39,344.39 ccw(c2717.79,318.79) 2717.79,355 ccw(c2717.79,391.21) R15.2@2743.39,365.61
  Top Layer w30: v2@76,1491 89,1478 LM1.5@176.14,1478 ; v2@76,1505 76,1747 99,1770 D_LM1.1@173.42,1770 D_LM1.1@173.42,1789 ; v2(77,1505) ccw(c142.18,1570.18) 142.18,1478 ; LM1.6@310,875.07 310,1211 ; LM1.3@310,1478 v2(310,1342) 310,1211 ; 562.51,1228.51 cw(c513,1278.01) v2(513,1208) ; LED9.2@654,1544 825,1544 826,1543 v2(826,1487) 821,1487 542,1208 v2(513,1208) ; LED9.2@656,1546 C11.1@656,1636 ; 809,534 811,532 ; 898,782 898,853 v1(899,854) ; 1387,782 1387,847 v1(1389,849) ; 1874,782 v1(1874,853) ; 2367,799 v1(2367,852) ; 310,1211 313,1208 v2(513,1208)
  Top Layer w50: R13.2@749,286 749,333 811,395 811,532 811,765 828,782 898,782 1387,782 1874,782 2480,782 2480,358 ; C12.2@1593,405 1593,369 1615,347 ; C12.2@1600.23,403 ccw(c1655.67,387.68) 1615,347 ; P1.1@1834,159 1924,159 1966,201 1966,347 1615,347 ; Z1.1@1963,364.42 Z1.1@1966,367.42 1975.42,358 R4.2@2066,358 C16.2@2316,358 R14.2@2396,358 2480,358 ; R15.2@2754,355 2751,358 2480,358
  Bottom Layer w10: v2@383,615 cw(c383,602.93) 391.54,611.46 cw(c400.07,620) v2@388,620 ; v2(383,620) 455,548 v1(455,302) ; v1@451.46,305.54 ccw(c442.93,314.07) 455,314.07 ccw(c467.07,314.07) v1@458.54,305.54 ; U2.14@1993.58,1817.42 2129,1817.42 2152,1840.42 2152,1842 2170,1860 2189,1860 ; v1@2155,2133 cw(c2155,2123.34) 2161.83,2130.17 ; v1(2155,2138) 2155,2137 2164.84,2127.16 U2.31@2164.84,2067.42 2164.84,1982.16 2189,1958 2189,1860 ; v1@2160,2138 ccw(c2174.49,2138) 2164.24,2127.76 ; v1@2184.46,1454.46 cw(c2175.93,1445.93) 2188,1445.93 cw(c2200.07,1445.93) 2191.54,1454.46 ccw(c2175.93,1470.07) 2198,1470.07 ; v1@2184.46,1461.54 ccw(c2151.79,1494.21) 2198,1494.21 ; v1@2303.46,1488.46 cw(c2294.93,1479.93) 2307,1479.93 cw(c2319.07,1479.93) v1@2310.54,1488.46 ; v1(2307,1492) 2307,1402 2296,1391 2204,1391 2188,1407 v1(2188,1458) 2198,1468 2198,1666 2184.53,1679.47 U2.5@2184.53,1744.58 U2.4@2204.21,1744.58 2204.21,1844.79 2189,1860 ; U1.11@2455,1525.91 2524.91,1525.91 2537,1538 ; v1(2511,838) 2539,838 2539,839 2554,854 2554,902 v1(2633,902) ; v1@2514.54,834.46 cw(c2523.07,825.93) 2523.07,838 cw(c2523.07,850.07) v1@2514.54,841.54 ; v1@2533.46,1494.54 ccw(c2524.93,1503.07) 2537,1503.07 ccw(c2549.07,1503.07) v1@2540.54,1494.54 ; v1(2537,1491) 2537,1538 ; 2553,905 2553,1113 2629,1189 v1(2629,1229) ; v1@2625.46,1225.46 cw(c2616.93,1216.93) 2629,1216.93 cw(c2641.07,1216.93) v1@2632.54,1225.46 ; v1@2629.46,898.46 ccw(c2620.93,889.93) 2620.93,902 ccw(c2620.93,914.07) v1@2629.46,905.54 ; U1.15@2714.84,1602.68 2601.68,1602.68 2537,1538 ; 2608.86,902 cw(c2608.86,877.86) 2625.93,894.93 ccw(c2608.86,877.86) 2608.86,902 ; 2608.86,902 ccw(c2608.86,926.14) 2625.93,909.07 cw(c2608.86,926.14) 2608.86,902
  Bottom Layer w20: v2(168,803) 168,643 191,620 v2(383,620)
  Bottom Layer w30: v2(77,1505) 77,1368 103,1342 v2(310,1342)
IN1: R17.1 U2.3 | length 1630.7
  Top Layer w10: v1@2275,1433 cw(c2275,1420.93) 2283.54,1429.46 cw(c2292.07,1438) v1@2280,1438 ; v1(2275,1438) 2300,1413 2521,1413 v1(2543,1391) ; v1@2538,1391 ccw(c2525.93,1391) 2534.46,1399.54 ccw(c2543,1408.07) v1@2543,1396
  Bottom Layer w10: U2.3@2223.9,1744.58 2223.9,1489.1 v1(2275,1438) ; v1@2270,1438 ccw(c2257.93,1438) 2266.46,1446.54 ccw(c2275,1455.07) v1@2275,1443 ; v2@2308.93,625.07 ccw(c2291.86,642.14) 2316,642.14 ccw(c2340.14,642.14) v2@2323.07,625.07 ; v2(2316,618) 2316,687 2533,904 2533,1381 v1(2543,1391) ; 2533,1354.79 cw(c2579.21,1354.79) v1@2546.54,1387.46 ; 2533,1378.93 cw(c2555.07,1378.93) v1@2539.46,1394.54
IN2: R18.1 U2.2 | length 2023.4
  Top Layer w10: v1(2600,1655) 2775.28,1655 2883,1547.28 2883,1242.72 2753.28,1113 2678,1113 2584,1019 2584,747 2628.5,702.5 2737.5,702.5 2754,686 R18.1@2754,615 ; v1@2603.54,1651.46 cw(c2612.07,1642.93) 2612.07,1655 cw(c2612.07,1667.07) v1@2603.54,1658.54
  Bottom Layer w10: U2.2@2243.58,1744.58 2243.58,1693.73 2282.31,1655 v1(2600,1655) ; v1@2596.46,1651.46 ccw(c2587.93,1642.93) 2587.93,1655 ccw(c2587.93,1667.07) v1@2596.46,1658.54
K1: C3.1 PT1.1 U1.9 | length 905.2
  Bottom Layer w10: PT1.1@2278,958 2462,958 2513,1009 2513,1474.72 U1.9@2455,1474.72 ; PT1.1@2281.54,954.46 cw(c2290.07,945.93) 2290.07,958 cw(c2290.07,970.07) PT1.1@2281.54,961.54
  Bottom Layer w20: C3.1@2277,852 2277,957 PT1.1@2278,958
K2: C4.1 PT2.1 U1.8 | length 1244.5
  Bottom Layer w10: PT2.1@1781.13,961.54 ccw(c1772.6,970.07) 1784.67,970.07 ccw(c1796.74,970.07) PT2.1@1788.2,961.54 ; PT2.1@1784.67,958 1784.67,1080.67 1811,1107 2333,1107 2359,1133 2359,1429 2379.13,1449.13 U1.8@2455,1449.13
  Bottom Layer w20: C4.1@1783.33,852 1783.33,956.67 PT2.1@1784.67,958
K3: C5.1 PT3.1 U1.7 | length 2032.4
  Bottom Layer w10: C5.1@1289.46,848.46 cw(c1280.93,839.93) 1293,839.93 cw(c1305.07,839.93) C5.1@1296.54,848.46 ; C5.1@1293,852 1293,752 1311,734 1941,734 1961,754 1961,1068 1980,1087 2341.28,1087 2379,1124.72 2379,1411 2391.54,1423.54 U1.7@2455,1423.54
  Bottom Layer w20: PT3.1@1291.33,958 1293,956.33 C5.1@1293,852
K4: C6.1 PT4.1 U1.6 | length 2736
  Bottom Layer w10: PT4.1@800.46,961.54 ccw(c791.93,970.07) 804,970.07 ccw(c816.07,970.07) PT4.1@807.54,961.54 ; PT4.1@804,958 804,1013 817,1026 1033,1026 1061,998 1061,753 1100,714 1949.28,714 1981,745.72 1981,1059 1989,1067 2349.57,1067 2399,1116.43 2399,1389 2407.95,1397.95 U1.6@2455,1397.95
  Bottom Layer w20: PT4.1@804,958 805,957 C6.1@805,852
KEY1: LED5.2 U1.16 U2.23 | length 1877.1
  Top Layer w10: v1@2061.46,1872.46 cw(c2052.93,1863.93) 2065,1863.93 cw(c2077.07,1863.93) v1@2068.54,1872.46 ; v1(2065,1876) 2065,1801.96 2122.96,1744 2216,1744 2242,1718 2242,1435.64 2290.64,1387 2368,1387 2384,1371 2384,1231 2380,1227 ; LED5.2@2317,1224 v1(2317,1225) 2319,1227 2380,1227 ; LED5.2@2320.54,1221.46 cw(c2333.9,1208.1) LED5.2@2333.9,1227 ; 2548.51,1227 ccw(c2548.51,1242.49) v1@2559.46,1231.54 ; v1(2563,1228) 2562,1227 2380,1227
  Bottom Layer w10: U2.23@1993.58,1994.58 2044.44,1994.58 2065,1974.02 v1(2065,1876) ; v1@2061.46,1879.54 ccw(c2052.93,1888.07) 2065,1888.07 ccw(c2077.07,1888.07) v1@2068.54,1879.54 ; v1@2559.46,1231.54 ccw(c2534.03,1256.97) 2570,1256.97 ; v1(2563,1228) 2570,1235 2570,1540 2607.09,1577.09 U1.16@2714.84,1577.09
KEY2: LED6.2 U1.17 U2.24 | length 2900
  Top Layer w10: v1(2074,1174) 2114,1174 2155,1133 2742.72,1133 2863,1253.28 2863,1529 2840.5,1551.5 v1(2780,1551.5) 2764.5,1536 2309,1536 2264,1581 2264,1732 2228,1768 2143.72,1768 2109,1802.72 v1(2109,1849) ; v1@2077.54,1170.46 cw(c2086.07,1161.93) 2086.07,1174 cw(c2086.07,1186.07) v1@2077.54,1177.54 ; v1@2105.46,1845.46 cw(c2096.93,1836.93) 2109,1836.93 cw(c2121.07,1836.93) v1@2112.54,1845.46 ; v1@2775,1551.5 cw(c2762.93,1551.5) 2771.46,1542.96 cw(c2780,1534.43) v1@2780,1546.5 ; v1@2783.54,1547.96 cw(c2792.07,1539.43) 2792.07,1551.5 cw(c2792.07,1563.57) v1@2783.54,1555.03
  Bottom Layer w10: v1@1823.46,1218.46 cw(c1814.93,1209.93) 1827,1209.93 cw(c1839.07,1209.93) v1@1830.54,1218.46 ; v1(1827,1222) 1827,1193 1846,1174 v1(2074,1174) ; U2.24@1995,2015.68 U2.24@1993.58,2014.27 1993.58,2014.08 2057.96,2014.08 2096,1976.04 2096,1862 v1(2109,1849) ; v1@2070.46,1170.46 ccw(c2061.93,1161.93) 2061.93,1174 ccw(c2061.93,1186.07) v1@2070.46,1177.54 ; v1@2104,1849 ccw(c2091.93,1849) 2100.46,1857.54 ccw(c2109,1866.07) v1@2109,1854 ; U1.17@2714.84,1551.5 v1(2780,1551.5) ; v1@2776.46,1547.96 ccw(c2767.93,1539.43) 2767.93,1551.5 ccw(c2767.93,1563.57) v1@2776.46,1555.03
KEY3: LED7.2 U1.18 U2.25 | length 4658.4
  Top Layer w10: LED7.2@1331.46,1217.46 cw(c1322.93,1208.93) 1335,1208.93 cw(c1347.07,1208.93) LED7.2@1338.54,1217.46 ; v1(1335,1221) 1335,1173 1353,1155 1910,1155 1921,1166 1921,1328 1894,1355 1894,1493 1881,1506 1881,1938 1847,1972 1186,1972 1157,2001 1157,2200 1179,2222 1754,2222 v1(1899,2077) ; v1@1894,2077 ccw(c1881.93,2077) 1890.46,2085.54 ccw(c1899,2094.07) v1@1899,2082 ; 1922,1221 v1(1938,1221) ; v1@1934.46,1217.46 ccw(c1925.93,1208.93) 1925.93,1221 ccw(c1925.93,1233.07) v1@1934.46,1224.54 ; v1(2039,1220) 2098.72,1220 2165.72,1153 2536,1153 v1(2567,1184) ; v1@2042.54,1216.46 cw(c2051.07,1207.93) 2051.07,1220 cw(c2051.07,1232.07) v1@2042.54,1223.54 ; v1@2562,1184 cw(c2549.93,1184) 2558.46,1175.46 cw(c2567,1166.93) v1@2567,1179
  Bottom Layer w10: v1(1899,2077) 1908.58,2067.42 U2.25@2046.73,2067.42 ; v1@1902.54,2080.54 ccw(c1934.21,2112.21) 1934.21,2067.42 ; v1(1938,1221) v1@2034,1221 ; v1@1941.54,1217.46 cw(c1950.07,1208.93) 1950.07,1221 cw(c1950.07,1233.07) v1@1941.54,1224.54 ; 2024.51,1221 cw(c2024.51,1205.51) v1@2035.46,1216.46 ; v1(2567,1184) 2596,1213 2596,1489 2632.91,1525.91 U1.18@2714.84,1525.91 ; v1@2567,1189 ccw(c2567,1201.07) 2575.54,1192.54 ccw(c2584.07,1184) v1@2572,1184